# Altium PCB PCB2.PcbDoc
Units mil, origin at the board's own origin, x right, y up, seen from the top; angles counter-clockwise.
Board outline 1760 x 1045 mil, 4 copper layers (Top Copper, Signal Layer 1, Signal Layer 2, Bottom Copper), stack 38.189 mil thick; 30 components, 37 nets, 149 pads, 72 vias.
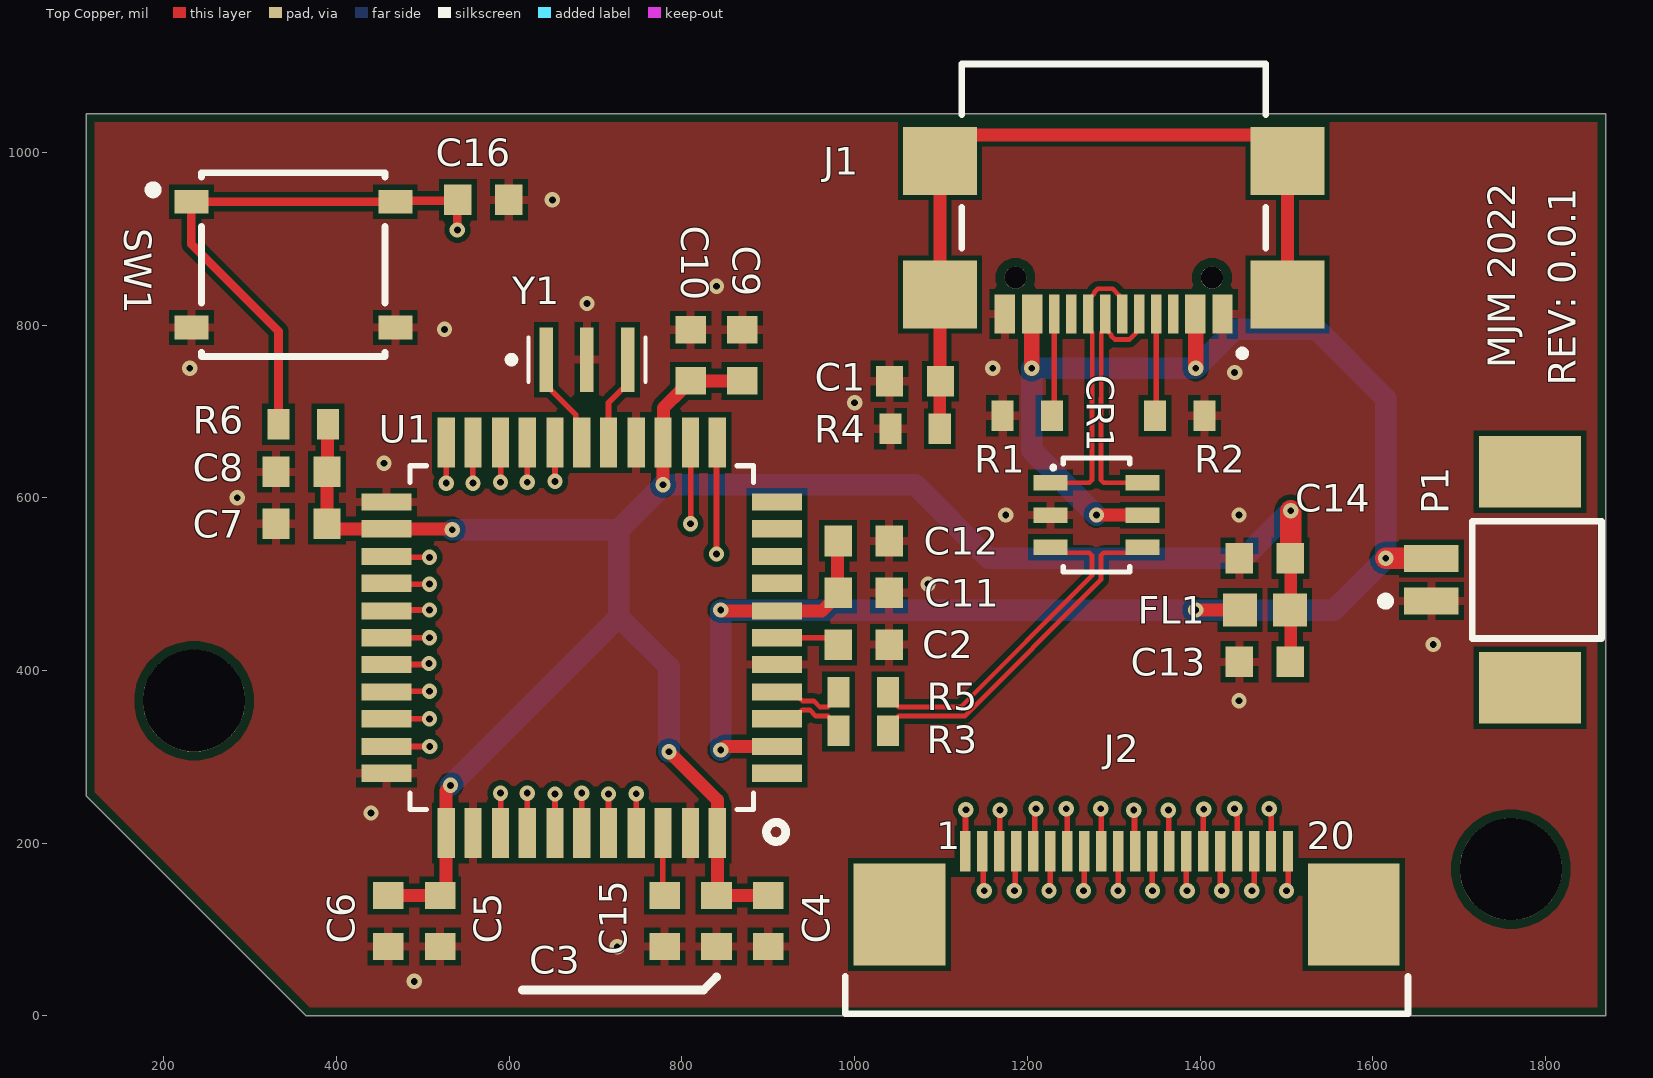
[diagram p0: Top Copper view]
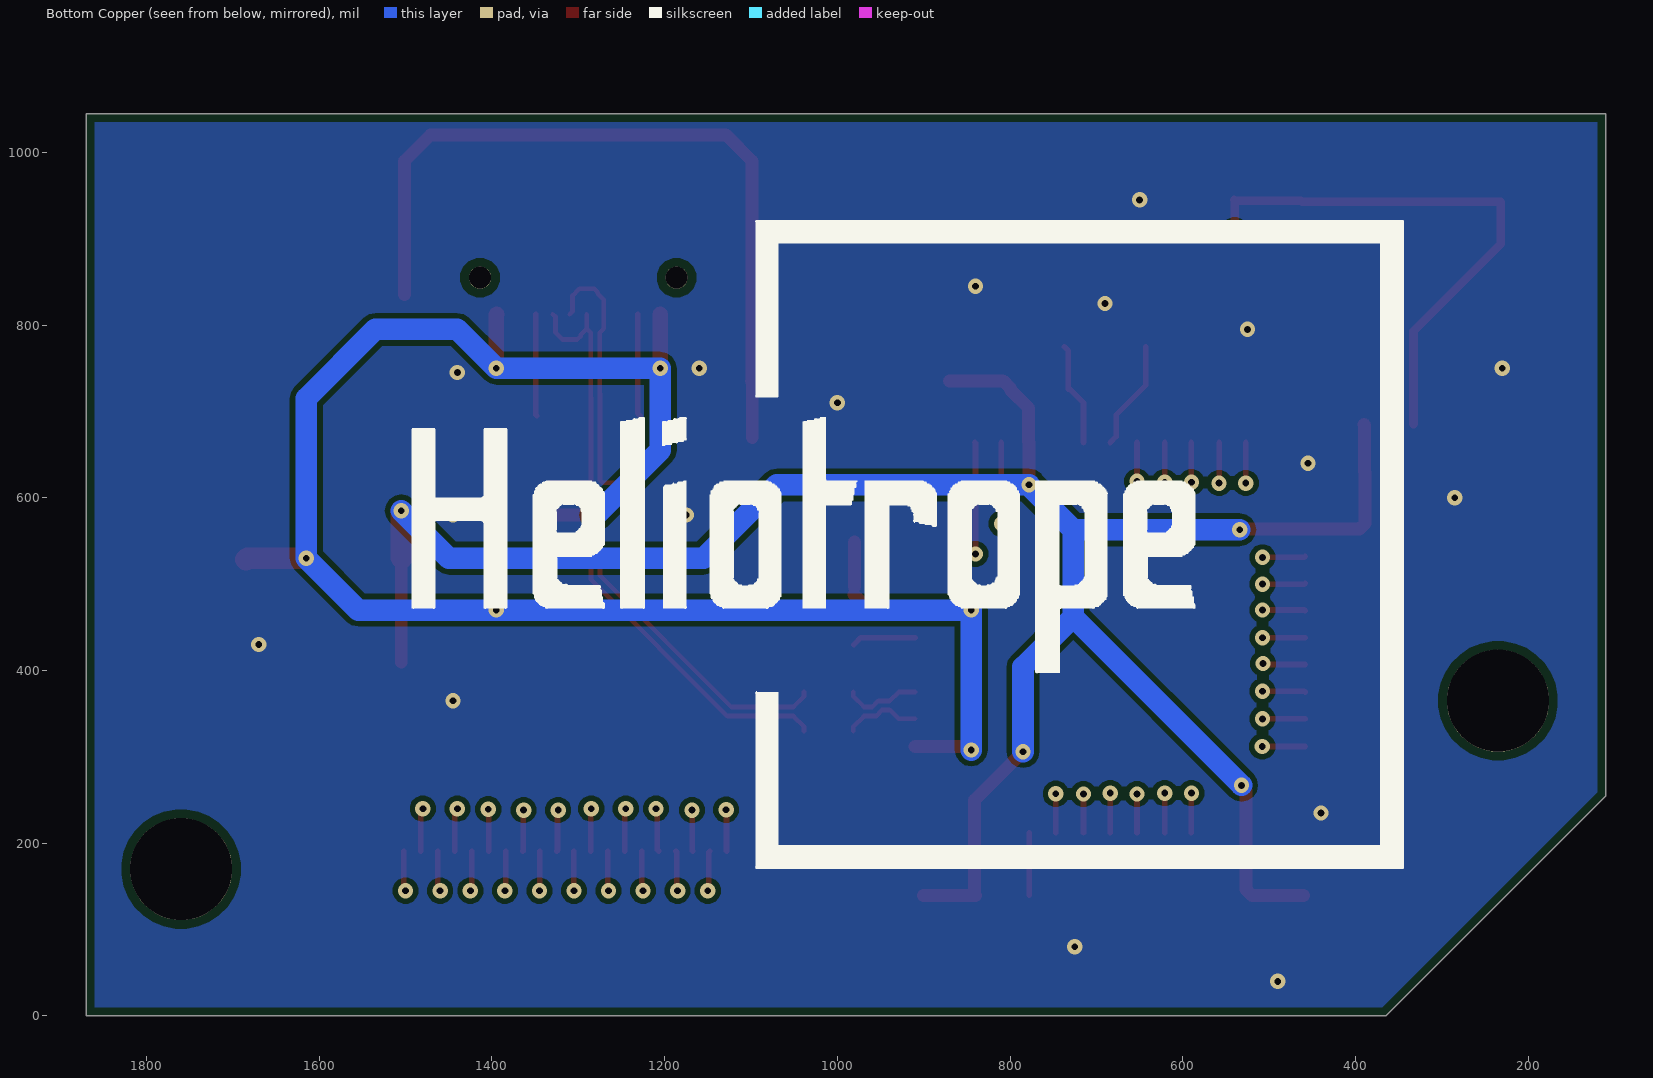
[diagram p1: Bottom Copper view, seen from below]
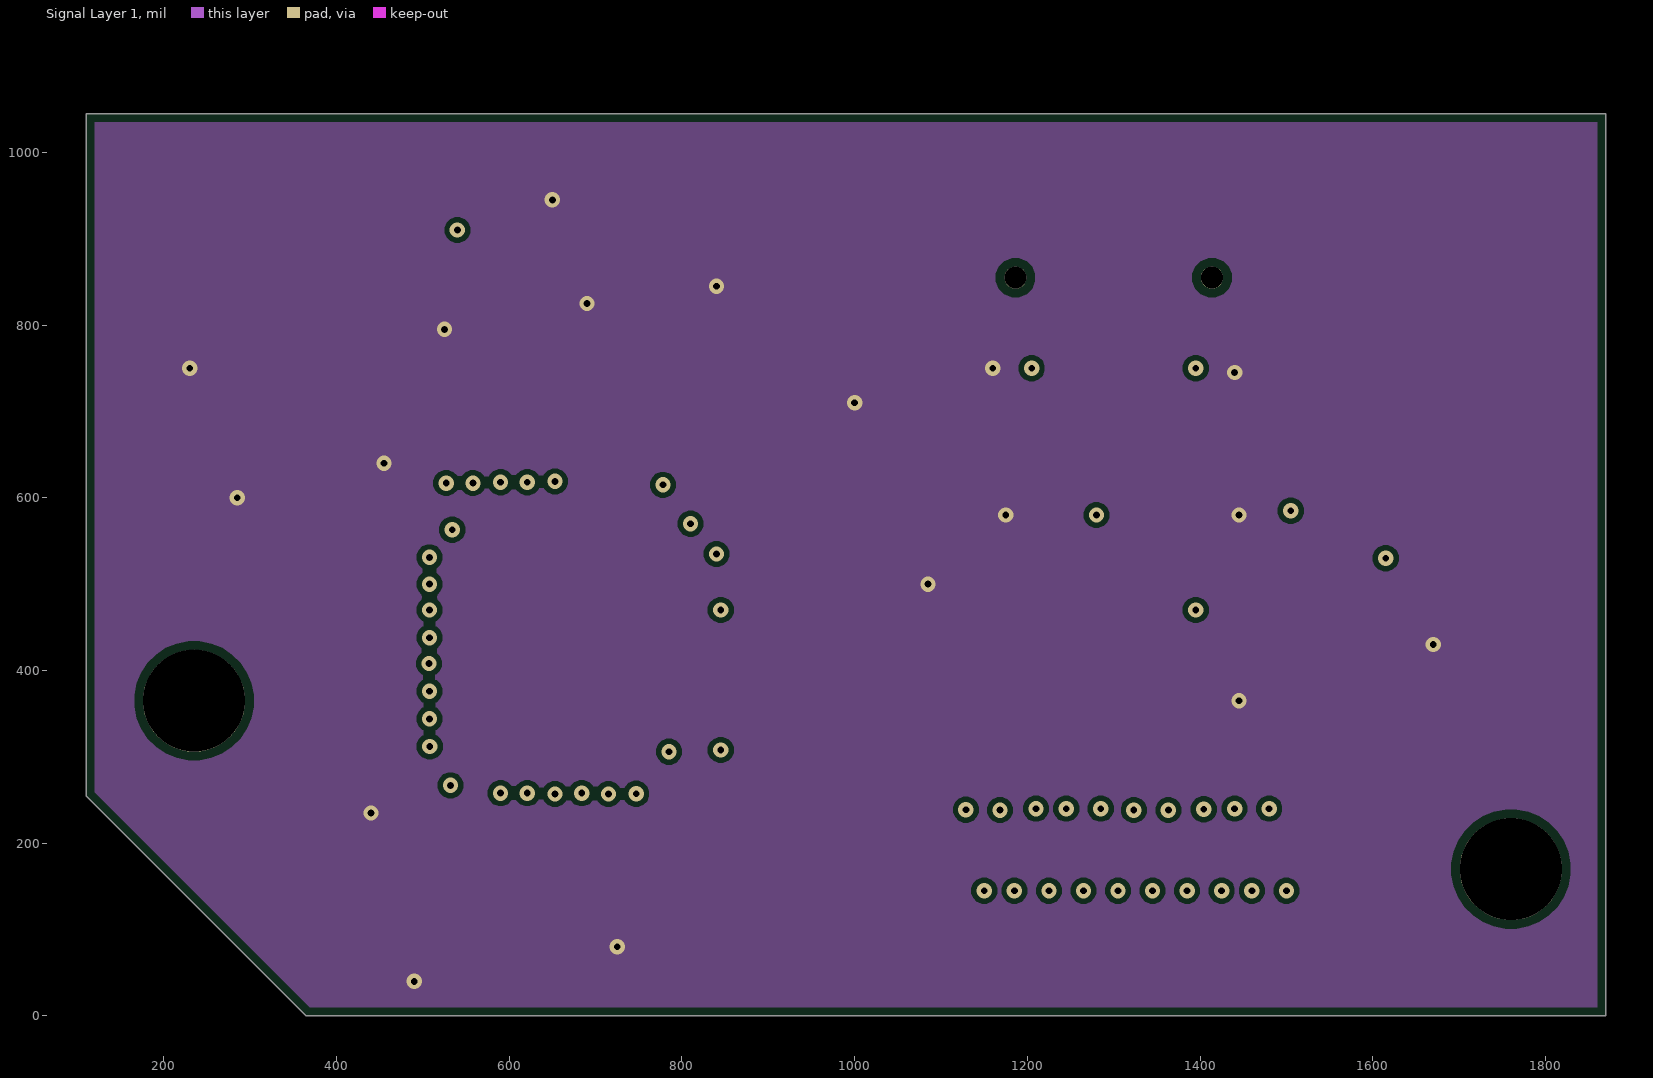
[diagram p2: Signal Layer 1]
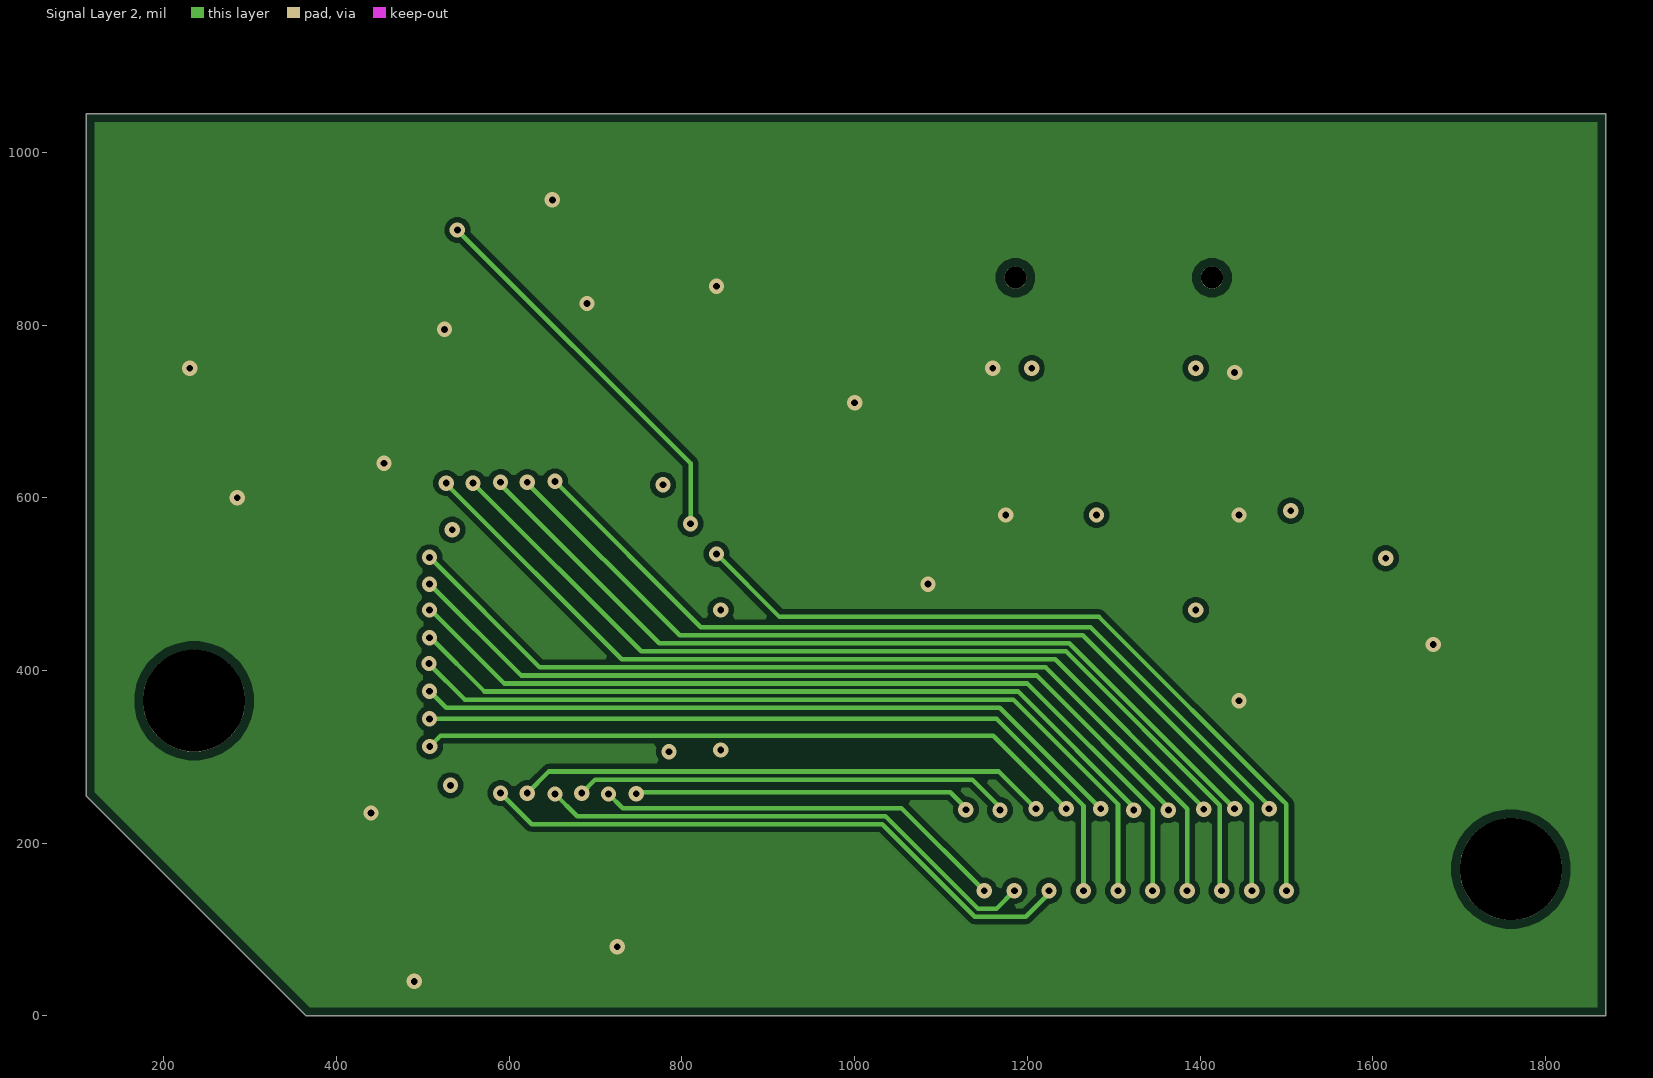
[diagram p3: Signal Layer 2]
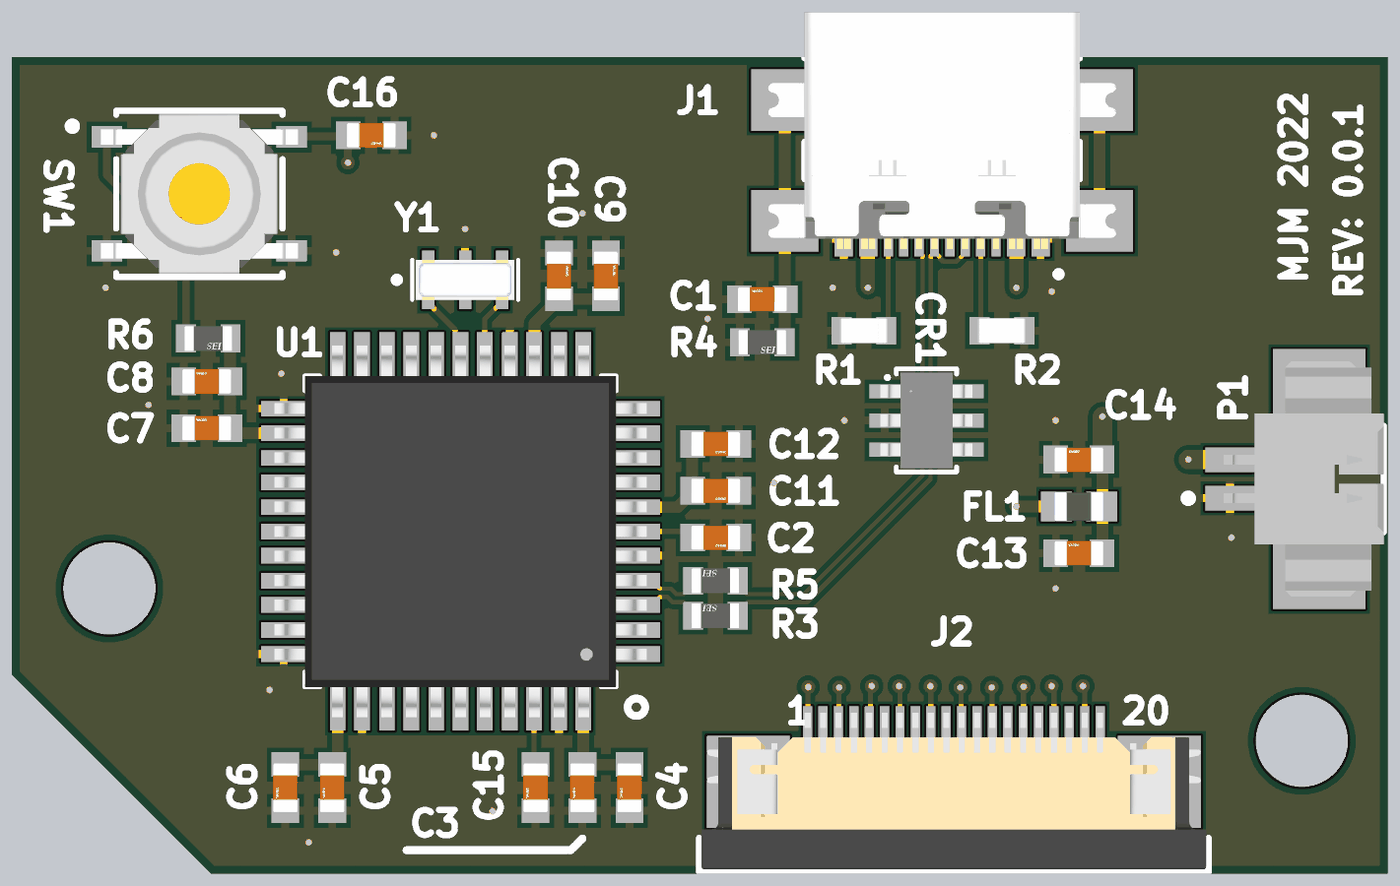
[diagram p4: 3D render of the assembled board from above, using the file's embedded part models]

## Layer stack, top to bottom
Top Mask: solder mask 0.591, Solder Resist, Dk 3.8
Top Copper: signal copper 1.378
Dielectric 1: prepreg 3.937, 2313, Dk 4.05
Signal Layer 1: signal copper 0.689
Core: core 26.181, FR-4, Dk 4.5
Signal Layer 2: signal copper 0.689
Dielectric 2: prepreg 3.937, 2313, Dk 4.05
Bottom Copper: signal copper 1.378
Bottom Mask: solder mask 0.591, Solder Resist, Dk 3.8

## Board outline
110,255 110,1045 1870,1045 1870,0 365,0

## Design rules (kind name [scope] priority, off if disabled: settings)
BoardOutlineClearance [All] p1: gap=7.87 ignorepadtopadclearanceinfootprint=FALSE except(10: Poly-OutlineEdge)
Clearance [All] p1: gap=6 ignorepadtopadclearanceinfootprint=FALSE except(4: Arc-Arc Arc-Track Arc-SMDPad Arc-THPad Arc-Text Track-Track Track-SMDPad Track-THPad Track-Text SMDPad-SMDPad SMDPad-THPad SMDPad-Text THPad-THPad THPad-Text Fill-Text Poly-Text Region-Text Text-Text; 5: Arc-Via Track-Via SMDPad-Via THPad-Via Via-Via Via-Text; 9.84: Arc-Hole Track-Hole SMDPad-Hole THPad-Hole Via-Hole Fill-Hole Poly-Hole Region-Hole Text-Hole)
ComponentClearance [All] p1: gap=4 collisioncheckmode=3 verticalgap=4 showdistances=TRUE
DiffPairsRouting [All] p1: maxlimit=5 minlimit=5 mostfreqgap=5 toplayer_minwidth=5.46 toplayer_maxwidth=5.46 toplayer_prefwidth=5.46 midlayer1_minwidth=4.2 midlayer1_maxwidth=4.2 midlayer1_prefwidth=4.2 midlayer2_minwidth=4.2 midlayer2_maxwidth=4.2 midlayer2_prefwidth=4.2 bottomlayer_minwidth=5.46 bottomlayer_maxwidth=5.46 bottomlayer_prefwidth=5.46 impedanceprofiledriven=TRUE impedanceprofileid={75FF0946-B88D-42D6-8CB2-588904BB7B58} impedanceprofilevalue=90.000000 maxuncoupledlength=500
Height [All] p1: minheight=0 maxheight=71497.94 prefheight=500
HoleSize [All] p1: absolutevalues=TRUE maxlimit=248.03 minlimit=7.87 maxpercent=80.000 minpercent=20.000
HoleToHoleClearance [All] p1: gap=9.84 allowstackedmicrovias=FALSE
MatchedLengths MatchLengths_xSignals_U3_U2_2 [InxSignalClass('xSignals_U3_U2_MatchLengthsClass_2')] p1: tolerance=400 checknetsindiffpair=FALSE checkdiffpairvsdiffpair=TRUE checkxsignals=TRUE checkothers=TRUE
MatchedLengths MatchLengths_xSignals_U3_U2_1 [InxSignalClass('xSignals_U3_U2_MatchLengthsClass_1')] p2: tolerance=400 checknetsindiffpair=FALSE checkdiffpairvsdiffpair=TRUE checkxsignals=TRUE checkothers=TRUE
MatchedLengths MatchLengths_xSignals_U3_U2 [InxSignalClass('xSignals_U3_U2_MatchLengthsClass')] p3: tolerance=400 checknetsindiffpair=FALSE checkdiffpairvsdiffpair=TRUE checkxsignals=TRUE checkothers=TRUE
MatchedLengths MatchLengths_xSignals_U1_U2_2 [InxSignalClass('xSignals_U1_U2_MatchLengthsClass_2')] p4: tolerance=400 checknetsindiffpair=FALSE checkdiffpairvsdiffpair=TRUE checkxsignals=TRUE checkothers=TRUE
MatchedLengths MatchLengths_xSignals_U1_U2_1 [InxSignalClass('xSignals_U1_U2_MatchLengthsClass_1')] p5: tolerance=400 checknetsindiffpair=FALSE checkdiffpairvsdiffpair=TRUE checkxsignals=TRUE checkothers=TRUE
MatchedLengths MatchLengths_xSignals_U1_U2 [InxSignalClass('xSignals_U1_U2_MatchLengthsClass')] p6: tolerance=400 checknetsindiffpair=FALSE checkdiffpairvsdiffpair=TRUE checkxsignals=TRUE checkothers=TRUE
MinimumAnnularRing [All] p1: minimumring=3
MinimumSolderMaskSliver [All] p1: minsoldermaskwidth=0
PlaneClearance [All] p1: clearance=6
PlaneConnect PlaneConnectPowerPads [InPadClass('PowerPads')] p1: planeconnectstyle=Direct reliefexpansion=20 reliefentries=4 reliefconductorwidth=10 reliefairgap=10
PlaneConnect [All] p2: pad.planeconnectstyle=Relief pad.reliefexpansion=11.81 pad.reliefentries=4 pad.reliefconductorwidth=10 pad.reliefairgap=6 via.planeconnectstyle=Direct via.reliefexpansion=11.81 via.reliefentries=4 via.reliefconductorwidth=5 via.reliefairgap=5
PolygonConnect PolygonConnectPowerPads [All vs (InPadClass('PowerPads'))] p1: connectstyle=Direct reliefconductorwidth=10 reliefentries=4 polygonreliefangle="90 Angle" airgapwidth=10
PolygonConnect [All] p2: thpad.connectstyle=Relief thpad.reliefconductorwidth=10 thpad.reliefentries=4 thpad.polygonreliefangle="90 Angle" thpad.airgapwidth=6 smdpad.connectstyle=Relief smdpad.reliefconductorwidth=10 smdpad.reliefentries=4 smdpad.polygonreliefangle="90 Angle" smdpad.airgapwidth=6 via.connectstyle=Direct via.reliefconductorwidth=5 via.reliefentries=4 via.polygonreliefangle="90 Angle" via.airgapwidth=5
RoutingVias [All] p1: holewidth=7.87 width=17.72 viastyle="Through Hole" minholewidth=7.87 minwidth=17.72 maxholewidth=248.03 maxwidth=257.87
SilkToSilkClearance [All] p1: silktosilkclearance=0
SilkToSolderMaskClearance [IsPad] p1: minsilkscreentomaskgap=4 clearancetoexposedcopper=TRUE
SolderMaskExpansion Vias [IsVia] p1: expansion=2.95 istentingtop=TRUE
SolderMaskExpansion [All] p2: expansion=2.95 istentingtop=FALSE
Width Power [(InNet('1V2') OR InNet('2V5') OR InNet('3V3') OR InNet('5V') OR InNet('VPLL') OR InNet('USB_VBUS') OR InNet('1V2') OR InNet('A_3V3') OR InNet('LED_B') OR InNet('LED_R')OR InNet('LED_G') or InNet('NetJ2_1'))] p1: maxlimit=25 minlimit=5 preferedwidth=10 minimp=50.000000 maximp=50.000000 favimp=50.000000
Width [All] p2: maxlimit=50 minlimit=5.29 preferedwidth=6.49 toplayer_minwidth=6.49 midlayer1_prefwidth=5.29 midlayer2_prefwidth=5.29 bottomlayer_minwidth=6.49 minimp=50.000000 maximp=50.000000 favimp=50.000000
20 further rules are at their usual default settings.

## Classes and differential pairs
differential pair USB: +USB_P -USB_N
differential pair E: +E_P -E_N
differential pair D: +D_P -D_N

## Components (designator, comment, footprint, x,y, rotation, side; value= is the part's Value field where it differs from the comment)
C1 "CC0603JRX7R9BB104" FP-CC0603-DA-MFG 1070,735 r0 top value=0.1uF
C2 "CC0603JRX7R7BB105" FP-CC0603-DA-MFG 1010.47,430 r180 top value=1uF
C3 "CC0603JRX7R9BB104" FP-CC0603-DA-MFG 840,110 r90 top value=0.1uF
C4 "CC0603JRX7R7BB105" FP-CC0603-DA-MFG 900,110 r90 top value=1uF
C5 "CC0603JRX7R9BB104" FP-CC0603-DA-MFG 520,110 r90 top value=0.1uF
C6 "CC0603JRX7R7BB105" FP-CC0603-DA-MFG 460,110 r90 top value=1uF
C7 "CC0603JRX7R9BB104" FP-CC0603-DA-MFG 359.53,570 r0 top value=0.1uF
C8 "CC0603JRX7R7BB105" FP-CC0603-DA-MFG 359.53,630 r0 top value=1uF
C9 "CC0603JRX7R9BB104" FP-CC0603-DA-MFG 870,765 r270 top value=0.1uF
C10 "CC0603JRX7R7BB105" FP-CC0603-DA-MFG 810,765 r270 top value=1uF
C11 "CC0603JRX7R7BB105" FP-CC0603-DA-MFG 1010.47,490 r180 top value=1uF
C12 "CC0603JRX7R9BB104" FP-CC0603-DA-MFG 1010.47,550 r180 top value=0.1uF
C13 "CC0603JRX7R9BB104" FP-CC0603-DA-MFG 1475,410 r0 top value=0.1uF
C14 "CC0603JRX7R7BB105" FP-CC0603-DA-MFG 1475,530 r0 top value=1uF
C15 "CC0603JRX7R9BB104" FP-CC0603-DA-MFG 780,110 r90 top value=0.1uF
C16 "CC0603JRX7R9BB104" FP-CC0603-DA-MFG 570,945 r180 top value=0.1uF
CR1 "IP4234CZ6,125" TSOP6_SOT457_NEX 1280,580 r0 top
FL1 "BLM18AG601SN1D" BEADC1608X95N 1475,470 r0 top value="600 Ohm"
J1 "USB4110-GF-A" GCT_USB4110-GF-A_REVB 1300,855 r180 top
J2 "68712014522" 68712014522 1315,90 r0 top
P1 "53261-0271" MOLX-53261-0271_V 1725,505 r90 top
R1 "RMCF0603JT5K10" FP-RMCF0603-MFG 1200,695 r0 top value=1.5K
R2 "RMCF0603JT5K10" FP-RMCF0603-MFG 1376.46,695 r180 top value=1.5K
R3 "RMCF0603JT22R0" FP-RMCF0603-MFG 1010,330 r180 top value=22
R4 "RMCF0603JT100K" FP-RMCF0603-MFG 1070,680 r0 top value=100K
R5 "RMCF0603JT22R0" FP-RMCF0603-MFG 1010,375 r180 top value=22
R6 "RMCF0603JT10K0" FP-RMCF0603-MFG 361.46,685 r0 top value=10K
SW1 "PTS526SK15SMTR2LFS" FP-PTS526SK15SMTR2LFS-MFG 350,870 r0 top
U1 "ATMEGA32U4-AU" QFP80P1200X1200X120-44N 684,438 r180 top
Y1 "CSTNE16M0V51Z000R0" OSC_CSTNE16M0V51Z000R0 690,760 r0 top

## Footprints (in the part's own frame and the unit in brackets; to place one, negate y for a bottom-side part, rotate by r counter-clockwise, add the part's x,y. Pads: shape width x height; smd on the part's side, far side on the other; paste and mask are expansions set on the pad)
68712014522 [mm] "ZIF Connectors, Horizontal, Bottom Contact, pitch 0.5mm, 20p"
  rect 0.3x1.2 smd: 1(-4.75,2.56) 2(-4.25,2.56) 3(-3.75,2.56) 4(-3.25,2.56) 5(-2.75,2.56) 6(-2.25,2.56) 7(-1.75,2.56) 8(-1.25,2.56) 9(-0.75,2.56) 10(-0.25,2.56) 11(0.25,2.56) 12(0.75,2.56) 13(1.25,2.56) 14(1.75,2.56) 15(2.25,2.56) 16(2.75,2.56) 17(3.25,2.56) 18(3.75,2.56) 19(4.25,2.56) 20(4.75,2.56)
  rect 2.7x3 smd: MP1(-6.68,0.7) MP2(6.68,0.7)
  silkscreen extent -8.27,-2.22 8.28,-1.12, body extent -8.2,-2.15 8.2,2.95, height 2.1
BEADC1608X95N [mm]
  rect 1x0.97 smd: 1(-0.735,0) 2(0.735,0)
  body extent -0.8,-0.48 0.8,0.47, height 0.78
FP-CC0603-DA-MFG [mm]
  rect 0.8x0.9 smd paste+0 mask+0: 1(-0.75,0) 2(0.75,0)
  body extent -1.43,-0.82 1.43,0.82, height 0.25
FP-PTS526SK15SMTR2LFS-MFG [mm]
  rect 1x0.7 smd paste+0 mask+0: 1(-3,1.85) 2(3,1.85) 3(-3,-1.85) 4(3,-1.85)
  silkscreen extent -4.25,-2.7 2.7,2.7, body extent -3.6,-2.8 3.6,2.8, height 0.25
FP-RMCF0603-MFG [mm]
  rect 0.65x0.9 smd paste+0 mask+0: 1(-0.725,0) 2(0.725,0)
  body extent -1.15,-0.58 1.15,0.58, height 0.25
GCT_USB4110-GF-A_REVB [mm]
  rect 0.6x1.15 smd: A1/B12(-3.2,1.075) A4/B9(-2.4,1.075) B1/A12(3.2,1.075) B4/A9(2.4,1.075)
  rect 0.3x1.15 smd: A5(-1.25,1.075) A6(-0.25,1.075) A7(0.25,1.075) A8(1.25,1.075) B5(1.75,1.075) B6(0.75,1.075) B7(-0.75,1.075) B8(-1.75,1.075)
  rect 2.18x2 smd: S1(-5.11,0.5) S2(5.11,0.5) S3(-5.11,-3.43) S4(5.11,-3.43)
  round 0.65 hole 0.65 unplated: ""(-2.89,0) ""(2.89,0)
  silkscreen extent -4.47,-6.28 4.47,2.33, body extent -5.65,-6.28 5.65,1.42, height 3.26
MOLX-53261-0271_V [mm] "Header, 2-Leads, Pitch 1.25mm"
  rect 0.8x1.6 smd: 1(-0.625,1.45) 2(0.625,1.45)
  rect 2.1x3 smd: MP1(-3.175,-1.45) MP2(3.175,-1.45)
  silkscreen extent -1.72,-3.55 1.73,2.92, body extent -3.82,-3.55 3.83,1.65, height 3.41
OSC_CSTNE16M0V51Z000R0 [mm]
  rect 0.4x1.9 smd: 1(-1.2,0) 2(0,0) 3(1.2,0)
  silkscreen extent -2.32,-0.65 1.72,0.65, body extent -1.6,-0.65 1.6,0.65, height 1
QFP80P1200X1200X120-44N [mil]
  rect 58x20 smd: 1(-226,157) 2(-226,126) 3(-226,94) 4(-226,63) 5(-226,31) 6(-226,0) 7(-226,-31) 8(-226,-63) 9(-226,-94) 10(-226,-126) 11(-226,-157) 23(226,-157) 24(226,-126) 25(226,-94) 26(226,-63) 27(226,-31) 28(226,0) 29(226,31) 30(226,63) 31(226,94) 32(226,126) 33(226,157)
  rect 20x58 smd: 12(-157,-226) 13(-126,-226) 14(-94,-226) 15(-63,-226) 16(-31,-226) 17(0,-226) 18(31,-226) 19(63,-226) 20(94,-226) 21(126,-226) 22(157,-226) 34(157,226) 35(126,226) 36(94,226) 37(63,226) 38(31,226) 39(0,226) 40(-31,226) 41(-63,226) 42(-94,226) 43(-126,226) 44(-157,226)
  silkscreen extent -236,-199 199,236, body extent -238,-238 238,238, height 63
TSOP6_SOT457_NEX [mil]
  rect 39.5x18 smd paste+0 mask+0: 1(-53.25,37.4) 2(-53.25,0) 3(-53.25,-37.4) 4(53.25,-37.4) 5(53.25,0) 6(53.25,37.4)
  silkscreen extent -52,-66 38,66, body extent -59,-61 59,61, height 43

## Part data
C1 C3 C5 C7 C9 C12 C13 C15 C16: library part CMP-004-000009-6, "0603 0.1 uF 50 V ±5 % Tolerance X7R SMT Multilayer Ceramic Capacitor", Type=0603
C2 C4 C6 C8 C10 C11 C14: library part CMP-004-000010-4, "Cap Ceramic 1uF 16V X7R 5% SMD 0603 125°C Paper T/R", Type=0603
CR1: library part CMP-028-000000-3, "TVS DIODE 5.5VWM 6TSOP", Mfr_Name=Nexperia, Component Type=Standard, Design Item ID=IP4234CZ6,125, Digi-Key_Part_Number_1=1727-4717-2-ND, Digi-Key_Part_Number_2=1727-4717-1-ND, Digi-Key_Part_Number_3=1727-4717-6-ND, Manufacturer_Part_Number=IP4234CZ6,125, Pin Count=6, Source=IP4234CZ6,125.SchLib
FL1: library part CMP-032-000000-2, "600 Ohms @ 100MHz 1 Ferrite Bead 0603 _1608 Metric_ 500mA 380mOhm", Manufacturer=Murata, Package=0608, Component Type=Standard, Design Item ID=BLM18AG601SN1D, Digi-Key_Part_Number=490-1014-1-ND, Manufacturer Product Number=BLM18AG601SN1D, Pin Count=2, Source=SnapEDAsch.SchLib
J1: library part CMP-130-000000-3, "Conn USB Type C RCP 16 POS 0.3mm/0.5mm Solder ST SMD 16 Terminal 1 Port T/R", Package=None, Availability=Unavailable, Component Type=Standard, Design Item ID=USB4110-GF-A_REVB, MP=USB4110-GF-A_REVB, Pin Count=16, Price=None, Source=USB4110-GF-A_REVB.SchLib
J2: library part CMP-00003-2, "Ffc / Fpc Board Connector, Zif, Surface Mount, Plug, 20, Bottom, 0.5 Mm Rohs Compliant: Yes", Package=None, Availability="In Stock", Check_prices=https://www.snapeda.com/parts/68712014522/Wurth+Electronics+Inc./view-part/?ref=eda, Component Type=Standard, Design Item ID=68712014522, MF="Wurth Electronics", MP=68712014522, Pin Count=20, Price=None, Purchase-URL=https://pricing.snapeda.com/search/part/68712014522/?ref=eda, SnapEDA_Link=https://www.snapeda.com/parts/68712014522/Wurth+Electronics+Inc./view-part/?ref=snap, Source=68712014522.SchLib
P1: library part CMP-042-000002-1, "1.25mm Pitch PicoBlade™ Header, Surface Mount, Right Angle, Lead-Free, 2 Circuits"
R1 R2: library part CMP-012-000000-1, "Res Thick Film 0603 5.1K Ohm 5% 1/10W ±200ppm/°C Molded SMD Paper T/R", Type=0603
R3 R5: library part CMP-000003-8, "Res Thick Film 0603 22 Ohm 5% 1/10W ±200ppm/°C Molded SMD Paper T/R", Type=0603
R4: library part CMP-000004-8, "Res Thick Film 0603 100K Ohm 5% 1/10W ±200ppm/°C Molded SMD Paper T/R", Type=0603
R6: library part CMP-012-000009-4, "Res Thick Film 0603 10K Ohm 5% 1/10W ±100ppm/°C Molded SMD SMD Paper T/R", Type=0603
SW1: library part CMP-094-000003-1, "Switch Tactile N.O. SPST Round Button Gull Wing 0.05A 12VDC 200000Cycles 2.55N SMD T/R"
U1: library part CMP-124-000000-5, "IC MCU 8BIT 32KB FLASH 44TQFP", Package=None, Availability=Unavailable, Component Type=Standard, Design Item ID=ATMEGA32U4-AU, MF="Microchip Technology / Atmel", MP=ATMEGA32U4-AU, Pin Count=44, Price=None, SnapEDA_Link=https://www.snapeda.com/parts/ATMEGA32U4-16AU/Atmel/view-part/4705464/?ref=snap, Source=SnapEDAsch.SchLib
Y1: library part CMP-128-000000-2, "Ceramic Resonator 16MHz 5pF 3-Pin Surface Mount Emboss T/R", Package="SMD-3 Murata", Check_prices=https://www.snapeda.com/parts/CSTNE16M0V51Z000R0/Murata/view-part/4705154/?ref=eda, Component Type=Standard, Design Item ID=CSTNE16M0V51Z000R0, MF="Murata Electronics", MP=CSTNE16M0V51Z000R0, Pin Count=3, Price=None, SnapEDA_Link=https://www.snapeda.com/parts/CSTNE16M0V51Z000R0/Murata/view-part/4705154/?ref=snap, Source=CSTNE16M0V51Z000R0.SchLib

## Free pads (board coordinates)
  round 118.11 hole 118.11 unplated: MOUNTING(235,365) MOUNTING(1760,170)

## Via types
v1: diameter 17.72, hole 7.87, Top Copper to Bottom Copper, tented both sides, 72 vias

## Nets (pads, with @x,y where several pads share a name; then routed paths per layer and width w, separated by ;. In a path a pad name is that pad's centre, name@x,y a point inside that pad or via, vN(x,y) a via of type N, cw(c..) or ccw(c..) an arc to the next point about the centre after c; other vN are vias at no path point)
CC1: J1.A5 R2.2 | length 118.2
  Top Copper w6.49: R2.2 1349.21,696.3 J1.A5
CC2: J1.B5 R1.2 | length 118.7
  Top Copper w6.49: R1.2 1231.1,697.56 J1.B5
COL0: J2.9 U1.30 | length 938.2
  Top Copper w6.49: U1.30 459,376 v1(507.64,376) ; v1@1285,240.24 v1@1285.47,239.76 ; J2.9 v1@1285.47,239.76 ; v1@1285.47,244.53 v1@1285.47,239.76
  Signal Layer 2 w5.29: v1(507.64,376) 508,376 526.94,357.06 1167.94,357.06 v1(1285,240)
COL1: J2.10 U1.29 | length 1060.8
  Top Copper w6.49: U1.29 506,407 v1(507,408) ; v1(1305,145) 1305.16,145.16 J2.10
  Signal Layer 2 w5.29: v1(507,408) 548.65,366.35 1183.65,366.35 1305,245 v1(1305,145)
COL2: J2.11 U1.28 | length 998.2
  Top Copper w6.49: U1.28 v1(507.64,438) ; v1(1323.33,238.33) 1324.09,237.57 1324.09,191.54 J2.11
  Signal Layer 2 w5.29: v1(507.64,438) 509,438 571.35,375.65 1189.35,375.65 1323.33,241.67 v1(1323.33,238.33)
COL3: J2.12 U1.27 | length 1123.7
  Top Copper w6.49: U1.27 459,470 v1(507.64,470) ; J2.12 1344.53,145.47 v1(1345,145)
  Signal Layer 2 w5.29: v1(507.64,470) 509,470 594.06,384.94 1200.06,384.94 1345,240 v1(1345,145)
COL4: J2.13 U1.26 | length 1064
  Top Copper w6.49: U1.26 459,500 v1(507.64,500) ; v1(1363.33,238.33) 1363.77,237.89 1363.77,191.23 J2.13
  Signal Layer 2 w5.29: v1(507.64,500) 508,500 613.77,394.23 1210.77,394.23 1363.33,241.67 v1(1363.33,238.33)
COL5: J2.14 U1.25 | length 1184.2
  Top Copper w6.49: U1.25 459,531 v1(507.64,531) ; J2.14 1383.9,151.1 v1@1385,150
  Signal Layer 2 w5.29: v1(507.64,531) 508,531 635.47,403.53 1221.47,403.53 1385,240 v1(1385,145)
COL6: J2.8 U1.31 | length 998.1
  Top Copper w6.49: U1.31 v1(507.64,344) ; v1@1265,140 1265.79,140.79 J2.8
  Signal Layer 2 w5.29: v1(507.64,344) 1164.34,344 1265,243.34 v1(1265,145)
COL7: J2.7 U1.32 | length 876.8
  Top Copper w6.49: U1.32 v1(508,312) ; v1@1245,240.55 v1@1246.1,239.45 ; J2.7 v1@1246.1,238.9
  Signal Layer 2 w5.29: v1(508,312) 520.47,324.47 1160.53,324.47 v1(1245,240)
COL8: J2.6 U1.36 | length 801
  Top Copper w6.49: U1.36 v1(590,258) ; v1(1225,145) 1226.42,146.42 J2.6
  Signal Layer 2 w5.29: v1(590,258) 625.89,222.11 1031.89,222.11 1139,115 1198.36,115 1225,141.64 v1(1225,145)
COL9: J2.5 U1.37 | length 713.7
  Top Copper w6.49: U1.37 v1(621,258) ; J2.5 1208.37,192.42 v1@1208.37,238.37 ; v1@1208.37,239.18 v1@1210,240.82
  Signal Layer 2 w5.29: v1(621,258) 646,283 1167,283 v1(1210,240)
COL10: J2.4 U1.38 | length 687.2
  Top Copper w6.49: U1.38 v1(653,257) ; v1(1185,145) 1186.02,146.02 1186.02,189.76 J2.4
  Signal Layer 2 w5.29: v1(653,257) 678.6,231.4 1035.74,231.4 1142.85,124.29 1164.29,124.29 v1(1185,145)
COL11: J2.3 U1.39 | length 601.4
  Top Copper w6.49: U1.39 v1(684,258) ; J2.3 1167.85,191.27 1167.85,237.85 v1(1168.33,238.33)
  Signal Layer 2 w5.29: v1(684,258) 699.71,273.71 1136.29,273.71 1168.33,241.67 v1(1168.33,238.33)
COL12: J2.2 U1.40 | length 573.1
  Top Copper w6.49: U1.40 v1(715,257) ; J2.2 1148.84,189.63 1148.84,146.16 v1(1150,145)
  Signal Layer 2 w5.29: v1(715,257) 731.31,240.69 1054.31,240.69 v1(1150,145)
COL13: J2.1 U1.41 | length 486
  Top Copper w6.49: U1.41 v1(747,257.2) ; J2.1 1128.41,191.21 1128.41,238.41 v1(1128.83,238.83)
  Signal Layer 2 w5.29: v1(747,257.2) 748.89,259.09 1110.91,259.09 1128.83,241.17 v1(1128.83,238.83)
D_N: CR1.6 J1.A7 J1.B7 | length 312
  Top Copper w5.46: J1.A7 J1.A7@1290.16,795.94 ; J1.B7 1326.35,809.5 1326.35,791.13 1318.54,783.31 1301.15,783.31 1297.21,787.25 1297.21,788.89 J1.A7@1290.16,795.94 ; CR1.6 1288.43,617.4 1285.23,620.6 1285.23,715.78 1285.54,716.09 1285.54,791.33 J1.A7@1290.16,795.94
D_P: CR1.1 J1.A6 J1.B6 | length 328.7
  Top Copper w5.46: CR1.1 1271.57,617.4 1274.77,620.6 1274.77,720.11 1275.09,720.43 1275.09,791.33 1270.47,795.94 J1.B6 1270.47,829.41 1277.52,836.46 1277.52,838.1 1281.46,842.04 1298.85,842.04 1306.67,834.23 1306.67,815.85 J1.A6
E_N: R3.2 U1.3 | length 88.6
  Top Copper w5.46: U1.3 929,344 939.27,354.27 948.25,354.27 955.25,347.27 969.11,347.27 981.46,334.92 R3.2
E_P: R5.2 U1.4 | length 88.6
  Top Copper w5.46: U1.4 929,375 939.27,364.73 952.58,364.73 959.58,357.73 969.11,357.73 981.46,370.08 R5.2
GND: C1.1 C2.1 C3.1 C4.1 C5.1 C6.1 C7.1 C8.1 C9.1 C10.1 C11.1 C12.1 C13.1 C14.1 C15.1 C16.1 CR1.2 J1.A1/B12 J1.B1/A12 P1.1 R1.1 R2.1 R4.1 SW1.3 SW1.4 U1.5 U1.15 U1.23 U1.33 U1.35 U1.43 Y1.2
  other v1: 490,40 725,80 440,235 1445,365 1670,430 1085,500 1175,580 1445,580 285,600 455,640 1000,710 1440,745 230,750 1160,750 525,795 690,825 840,845 650,945
NetC1_2: C1.2 J1.S1 J1.S2 J1.S3 J1.S4 R4.2 | length 902.6
  Top Copper w15: R4.2@1098.54,670 1098.54,734.02 C1.2 1098.82,735.71 J1.S2 J1.S4 1128.78,1020 1471.22,1020 J1.S3 J1.S1
NetC2_2: C2.2 U1.6 | length 74.3
  Top Copper w6.49: U1.6 972.94,438 C2.2
NetC15_2: C15.2 U1.42 | length 72.5
  Top Copper w6.49: C15.2@778,139.53 U1.42
RESET: C16.2 R6.1 SW1.1 SW1.2 U1.13 | length 1190.2
  Top Copper w6.49: v1(810,570) U1.13
  Top Copper w10: R6.1 332.91,792.8 231.89,893.82 SW1.1 462.2,942.83 463.29,943.92 539.39,943.92 C16.2 540,944.53 v1(540,910)
  Signal Layer 2 w5.29: v1(540,910) 810,640 v1(810,570)
RGB: J2.15 U1.22 | length 1130.9
  Top Copper w6.49: v1(527,617) U1.22 ; J2.15 1403.92,191.12 1403.92,238.92 v1(1404.26,239.26)
  Signal Layer 2 w5.29: v1(527,617) 527,616 730.18,412.82 1232.18,412.82 1404.26,240.74 v1(1404.26,239.26)
ROW0: J2.20 U1.12 | length 1051.2
  Top Copper w6.49: v1(840,535) 840,663 U1.12 ; v1@1500,150 1502.01,152.01 J2.20
  Signal Layer 2 w5.29: v1(840,535) 913,462 1283,462 1496.45,248.55 1498.45,246.55 1500,245 1500,242.84 v1(1500,145)
ROW1: J2.19 U1.18 | length 1081
  Top Copper w6.49: v1(653,619) U1.18 ; v1@1480,241.16 v1@1482.32,238.84 ; J2.19 v1@1482.32,237.68
  Signal Layer 2 w5.29: v1(653,619) 822,450 1273.14,450 1480,243.14 v1(1480,240)
ROW2: J2.18 U1.19 | length 1187
  Top Copper w6.49: v1(621,618) U1.19 ; v1(1460,145) 1462.64,147.64 J2.18
  Signal Layer 2 w5.29: v1(621,618) 621,617 797.29,440.71 1264.29,440.71 1460,245 v1(1460,145)
ROW3: J2.17 U1.20 | length 1104.8
  Top Copper w6.49: v1(590,618) U1.20 ; v1@1440,241.48 v1@1442.95,238.52 ; J2.17 v1@1442.95,237.05
  Signal Layer 2 w5.29: v1(590,618) 590,615 773.59,431.41 1248.59,431.41 v1(1440,240)
ROW4: J2.16 U1.21 | length 1207.8
  Top Copper w6.49: v1(558,617) U1.21 ; J2.16 1423.27,151.73 v1@1425,150
  Signal Layer 2 w5.29: v1(558,617) 752.88,422.12 1244.74,422.12 1423,243.86 1423,147 v1(1425,145)
USB_N: CR1.4 R3.1 | length 402
  Top Copper w5.46: R3.1 1038.54,334.92 1050.89,347.27 1127.27,347.27 1285.23,505.23 1285.23,533.13 1288.43,536.33 1326.98,536.33 CR1.4
USB_P: CR1.3 R5.1 | length 384.7
  Top Copper w5.46: R5.1 1038.54,370.08 1050.89,357.73 1122.94,357.73 1274.77,509.56 1274.77,533.13 1271.57,536.33 1233.02,536.33 CR1.3
VCC: C3.2 C4.2 C5.2 C6.2 C7.2 C8.2 C9.2 C10.2 C13.2 C14.2 FL1.2 R6.2 U1.14 U1.24 U1.34 U1.44 | length 2683.4
  Top Copper w15: R6.2 389.53,684.53 389.53,630.47 C8.2 C7.2 395.06,564 U1.24 532.26,564 532.75,563.52 v1@533.11,563.89 ; C6.2 C5.2 527,146.53 U1.34 527,261.26 532,266.26 v1(532,267) ; v1(778,615) U1.14 778.67,664.67 778.67,704.15 799.78,725.26 799.78,727.22 808.03,735.47 C10.2 C9.2 ; v1(785,306) 841,250 U1.44 C3.2@841,139.53 ; C3.2 C3.2@841,139.53 ; C4.2 C3.2@841,139.53 ; FL1.2 FL1.2@1505,470 ; C13.2@1505,410 FL1.2@1505,470 ; C14.2@1505,530 FL1.2@1505,470
  Top Copper w25: C14.2 1505,530.47 v1(1505,585)
  Bottom Copper w25: v1(532,267) 727,462 ; v1(534,563) 727,563 ; v1(785,306) 785,404 727,462 ; v1(1505,585) 1450,530 1155,530 1070,615 v1(778,615) 778,614 727,563 ; 727,462 727,563
VUSB: C11.2 C12.2 CR1.5 FL1.1 J1.A4/B9 J1.B4/A9 P1.2 U1.2 U1.7 | length 2367.7
  Top Copper w6.49: C11.2@980.94,488.03 C11.2
  Top Copper w15: v1(845,307.96) 845.74,307.96 849.77,312 U1.2 ; v1@846.74,469 U1.7 961.91,469 C11.2@980.94,488.03 ; C11.2@980,496.69 C12.2@980,548.65 ; v1(1280,580) CR1.5 ; v1(1395,470) FL1.1
  Top Copper w18: v1(1205,750) J1.B4/A9@1205,812.68 ; J1.A4/B9 1395,812.17 v1(1395,750)
  Top Copper w25: v1(1615,530) 1683.26,530 P1.2@1684.78,528.49
  Bottom Copper w25: v1(845,307.96) v1(845,470) v1(1395,470) 1555,470 v1(1615,530) 1615,715 1535,795 1440,795 v1(1395,750) v1(1205,750) 1205,655 v1(1280,580)
X1: U1.17 Y1.1 | length 128.1
  Top Copper w6.49: Y1.1@642.76,775 642.76,730.47 677.25,695.98 677.25,670.75 U1.17
X2: U1.16 Y1.3 | length 121.3
  Top Copper w6.49: U1.16 715,710 730.84,725.84 732.62,725.84 732.62,770.37 Y1.3@737.24,775
pads on no net: J1. J1.A8 J1.B8 J2.MP1 J2.MP2 P1.MP1 P1.MP2 U1.1 U1.8 U1.9 U1.10 U1.11

## Polygon pours and split planes (outlines as drawn)
GND on Signal Layer 2 "NONET_L-01_P-001" (solid, remove dead copper, pour order 0): 110,0 110,1045 1870,1045 1870,0
GND on Top Copper "NONET_L-01_P-001" (solid, remove dead copper, pour order 1): 110,0 110,1045 1870,1045 1870,0
GND on Signal Layer 1 "NONET_L-01_P-001" (solid, remove dead copper, pour order 3): 110,0 110,1045 1870,1045 1870,0
GND on Bottom Copper "NONET_L-01_P-001" (solid, remove dead copper, pour order 4): 110,0 110,1045 1870,1045 1870,0

## Silkscreen, mask and mechanical layers (free items; w line width, h text height)
Top Overlay:
  lines w10: 615,30 820,30 825,30 840,45
  text "MJM 2022" at 1765,750 h32 r90
  text "REV: 0.0.1" at 1835,730 h32 r90
Bottom Overlay:
  drawing of 12 lines, arcs and shapes, not listed
OUTLINE:
  the board outline again, w10

## Text inside footprints (layer, text, board x,y; h text height)
J2: Top Overlay "1" at 1094.53,192.76 h32; Top Overlay "20" at 1523.66,192.76 h32